# Altium PCB Main.PcbDoc (part 3 of 4)
Units mil, origin at the board's own origin, x right, y up, seen from the top; angles counter-clockwise.
Board outline 4000 x 4000 mil, 4 copper layers (L1-Top, L2-Ground, L3-Power, L4-Bottom), stack 63.556 mil thick; 424 components, 250 nets, 1628 pads, 3310 vias.
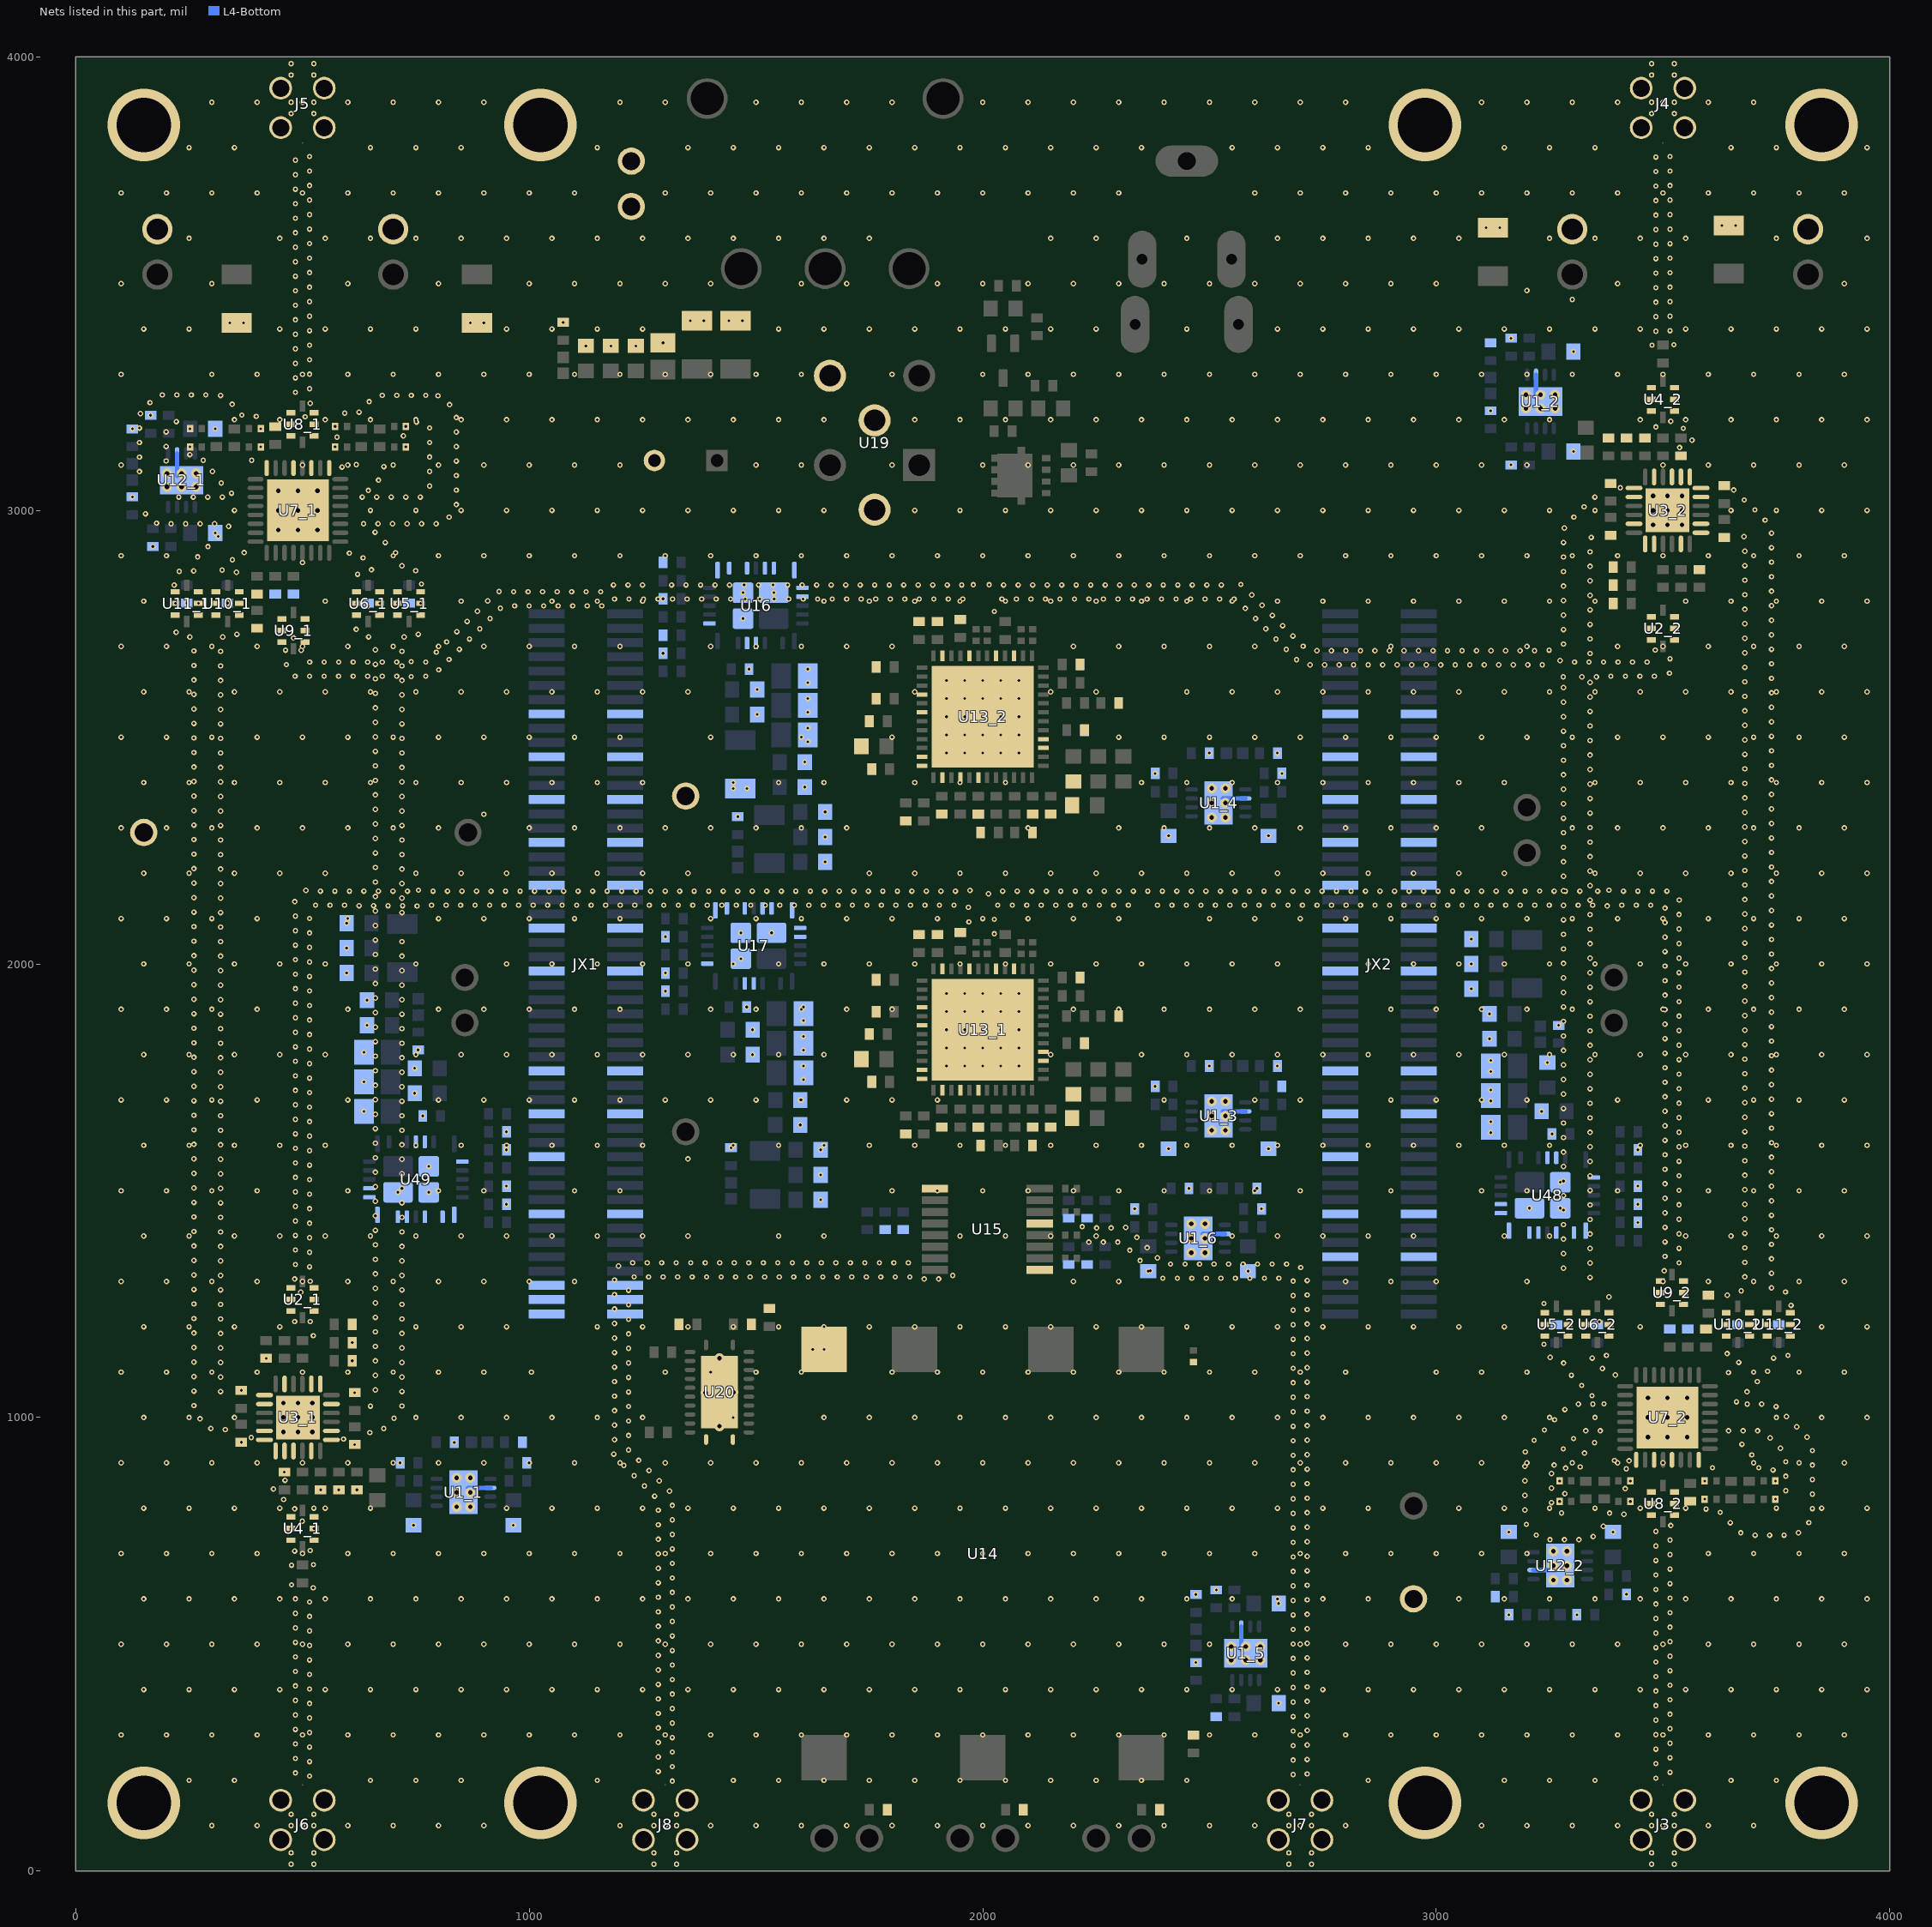
[diagram p5: the nets of this part, all layers, seen from the top]

## Via types
v1: diameter 12, hole 6, L1-Top to L2-Ground, tented top, 1761 vias
v2: diameter 12, hole 6, L1-Top to L4-Bottom, tented both sides, 971 vias
v3: diameter 12, hole 6, L3-Power to L4-Bottom, tented bottom, 308 vias
v4: diameter 12, hole 6, L3-Power to L4-Bottom, tented both sides, 148 vias
v5: diameter 22, hole 10, L1-Top to L4-Bottom, tented top, 48 vias
v6: diameter 22, hole 10, L1-Top to L4-Bottom, 36 vias
v7: diameter 12, hole 6, L1-Top to L2-Ground, tented both sides, 20 vias
v8: diameter 160, hole 120, L1-Top to L4-Bottom, 8 vias
v9: diameter 22, hole 10, L1-Top to L4-Bottom, tented both sides, 4 vias
v10: diameter 80, hole 66.93, L1-Top to L4-Bottom, tented both sides, 2 vias
v11: diameter 40, hole 31.5, L1-Top to L4-Bottom, 2 vias
v12: diameter 60, hole 47.24, L1-Top to L4-Bottom, 2 vias

## Nets (pads, with @x,y where several pads share a name; then routed paths per layer and width w, separated by ;. In a path a pad name is that pad's centre, name@x,y a point inside that pad or via, vN(x,y) a via of type N, cw(c..) or ccw(c..) an arc to the next point about the centre after c; other vN are vias at no path point) (continued)
GND: C1_1.1 C1_2.1 C1_3.1 C1_4.1 C1_5.1 C1_6.1 C2_1.1 C2_2.1 C2_3.1 C2_4.1 C2_5.1 C2_6.1 C3_1.1 C3_2.1 C3_3.1 C3_4.1 C3_5.1 C3_6.1 C4_1.2 C4_2.2 C5_1.2 C5_2.2 C6.2 C6_1.2 C6_2.2 C11_1.2 C11_2.2 C12_1.2 C12_2.2 C13_1.2 C13_2.2 C14_1.2 C14_2.2 C15_1.1 C15_2.1 C16.2 C16_1.1 C16_2.1 C17_1.1 C17_2.1 C18_1.2 C18_2.2 C19_1.2 C19_2.2 C21_1.2 C21_2.2 C22_1.1 C22_2.1 C23_1.2 C23_2.2 C24_1.1 C24_2.1 C25_1.2 C25_2.2 C26_1.1 C26_2.1 C27_1.1 C27_2.1 C28_1.2 C28_2.2 C29_1.1 C29_2.1 C30.1 C30_1.1 C30_2.1 C31_1.1 C31_2.1 C32_1.1 C32_2.1 C33_1.1 C33_2.1 C34_1.1 C34_2.1 C35_1.1 C35_2.1 C36_1.1 C36_2.1 C37_1.1 C37_2.1 C38_1.1 C38_2.1 C41_1.1 C41_2.1 C42_1.1 C42_2.1 C45.1 C45_1.1 C45_2.1 C46.1 C46_1.1 C46_2.1 C47.1 C47_1.1 C47_2.1 C48_1.1 C48_2.1 C49_1.1 C49_2.1 C50_1.1 C50_2.1 C51_1.1 C51_2.1 C52_1.1 C52_2.1 C53_1.1 C53_2.1 C54_1.1 C54_2.1 C56_1.1 C56_2.1 C61.2 C62.2 C63.2 C64.2 C65.1 C66.1 C67.2 C68.2 C69.2 C70.1 C71.1 C72.1 C73.1 C74.1 C75.1 C76.1 C77.1 C78.1 C79.1 C80.1 C81.1 C82.2 C83.1 C84.1 C85.1 C86.1 C87.1 C88.1 C89.1 C90.1 C91.1 C92.1 C93.1 C97.2 C98.1 C99.1 C100.1 C101.1 C102.1 C103.1 C105.1 C106.1 C107.1 C108.1 C110.1 C111.1 C194.1 C203.1 C227.1 C228.1 C229.1 C231.1 C232.1 C233.1 C234.1 C235.1 C236.1 C237.1 C238.1 C239.1 C241.1 C242.1 C243.1 C244.1 J2.1 J2.2 J3.G J4.G J5.G J6.G J7.G J8.G J9.2 J10.2 J11.2 J12.2 JX1.15 JX1.16 JX1.21 JX1.22 JX1.27 JX1.28 JX1.33 JX1.34 JX1.39 JX1.40 JX1.45 JX1.46 JX1.51 JX1.52 JX1.65 JX1.66 JX1.71 JX1.72 JX1.77 JX1.85 JX1.86 JX1.95 JX1.96 JX1.97 JX1.98 JX1.99 JX1.100 JX2.15 JX2.16 JX2.21 JX2.22 JX2.27 JX2.28 JX2.33 JX2.34 JX2.39 JX2.40 JX2.45 JX2.46 JX2.51 JX2.52 JX2.65 JX2.66 JX2.71 JX2.72 JX2.77 JX2.85 JX2.86 JX2.91 JX2.92 R3_1.1 R3_2.1 R3_3.1 R3_4.1 R3_5.1 R3_6.1 R4_1.1 R4_2.1 R4_3.1 R4_4.1 R4_5.1 R4_6.1 R5_1.1 R5_2.1 R5_3.1 R5_4.1 R5_5.1 R5_6.1 R6_1.1 R6_2.1 R7_1.1 R7_2.1 R8_1.1 R8_2.1 R9_1.1 R9_2.1 R10_1.1 R10_2.1 R11_1.1 R11_2.1 R12_1.2 R12_2.2 R14_1.1 R14_2.1 R15_1.2 R15_2.2 R18_1.1 R18_2.1 R19_1.1 R19_2.1 R20_1.1 R20_2.1 R22_1.2 R22_2.2 R26_1.2 R26_2.2 R27_1.1 R27_2.1 R28_1.1 R28_2.1 R29_1.2 R29_2.2 R35.1 R37.1 R38.1 R39.1 R43.1 R44.1 R45.1 R50.1 R54.1 R55.1 R59.2 R60.1 R61.1 R62.1 R66.1 R90.1 R93.1 R95.1 R96.1 R97.1 TP4.1 TP5.1 TP6.1 U1_1.6 U1_1.9 U1_2.6 U1_2.9 U1_3.6 U1_3.9 U1_4.6 U1_4.9 U1_5.6 U1_5.9 U1_6.6 U1_6.9 U2_1.1 U2_1.2 U2_1.3 U2_1.5 U2_1.6 U2_1.7 U2_2.1 U2_2.2 U2_2.3 U2_2.5 U2_2.6 U2_2.7 U3_1.1 U3_1.2 U3_1.5 U3_1.7 U3_1.8 U3_1.11 U3_1.12 U3_1.13 U3_1.14 U3_1.15 U3_1.17 U3_1.19 U3_1.20 U3_1.23 U3_1.25 U3_2.1 U3_2.2 U3_2.5 U3_2.7 U3_2.8 U3_2.11 U3_2.12 U3_2.13 U3_2.14 U3_2.15 U3_2.17 U3_2.19 U3_2.20 U3_2.23 U3_2.25 U4_1.1 U4_1.2 U4_1.3 U4_1.5 U4_1.6 U4_1.7 U4_2.1 U4_2.2 U4_2.3 U4_2.5 U4_2.6 U4_2.7 U5_1.1 U5_1.2 U5_1.3 U5_1.5 U5_1.6 U5_1.7 U5_2.1 U5_2.2 U5_2.3 U5_2.5 U5_2.6 U5_2.7 U6_1.1 U6_1.2 U6_1.3 U6_1.5 U6_1.6 U6_1.7 U6_2.1 U6_2.2 U6_2.3 U6_2.5 U6_2.6 U6_2.7 U7_1.1 U7_1.3 U7_1.5 U7_1.8 U7_1.33 U7_2.1 U7_2.3 U7_2.5 U7_2.8 U7_2.33 U8_1.1 U8_1.2 U8_1.3 U8_1.5 U8_1.6 U8_1.7 U8_2.1 U8_2.2 U8_2.3 U8_2.5 U8_2.6 U8_2.7 U9_1.1 U9_1.2 U9_1.3 U9_1.5 U9_1.6 U9_1.7 U9_2.1 U9_2.2 U9_2.3 U9_2.5 U9_2.6 U9_2.7 U10_1.1 U10_1.2 U10_1.3 U10_1.5 U10_1.6 U10_1.7 U10_2.1 U10_2.2 U10_2.3 U10_2.5 U10_2.6 U10_2.7 U11_1.1 U11_1.2 U11_1.3 U11_1.5 U11_1.6 U11_1.7 U11_2.1 U11_2.2 U11_2.3 U11_2.5 U11_2.6 U11_2.7 U12_1.6 U12_1.9 U12_2.6 U12_2.9 U13_1.2 U13_1.4 U13_1.6 U13_1.15 U13_1.16 U13_1.27 U13_1.29 U13_1.32 U13_1.35 U13_1.40 U13_1.42 U13_1.47 U13_1.48 U13_1.49 U13_2.2 U13_2.4 U13_2.6 U13_2.15 U13_2.16 U13_2.27 U13_2.29 U13_2.32 U13_2.35 U13_2.40 U13_2.42 U13_2.47 U13_2.48 U13_2.49 U14.7 U15.1 U15.9 U15.13 U16.1 U16.2 U16.3 U16.5 U16.6 U16.7 U16.8 U16.9 U16.16 U16.17 U16.20 U16.25 U16.26 U16.28 U17.1 U17.2 U17.3 U17.5 U17.6 U17.7 U17.8 U17.9 U17.16 U17.17 U17.20 U17.25 U17.26 U17.28 U19.3 U19.4 U19.6 U20.12 U20.13 U20.25 U48.1 U48.2 U48.3 U48.5 U48.6 U48.7 U48.8 U48.9 U48.16 U48.17 U48.20 U48.25 U48.26 U48.28 U49.1 U49.2 U49.3 U49.5 U49.6 U49.7 U49.8 U49.9 U49.16 U49.17 U49.20 U49.25 U49.26 U49.28
  other v1: 1315.55,198.17 3484.45,204.66 515.55,209.3 2684.45,212.54 2715.55,214.01 484.45,216.09 3515.55,217.66 1284.45,219.43 1315.55,230.17 3484.45,236.66 515.55,241.3 2684.45,244.54 2715.55,246.01 484.45,248.09 3515.55,249.66 1284.45,251.43 1315.55,262.17 3484.45,268.66 515.55,273.3 2684.45,276.54 2715.55,278.01 484.45,280.09 3515.55,281.66 1284.45,283.43 1315.55,294.17 3484.45,300.66 515.55,305.3 2684.45,308.54 2715.55,310.01 484.45,312.09 3515.55,313.66 1284.45,315.43 1315.55,326.17 3484.45,332.66 515.55,337.3 2684.45,340.54 2715.55,342.01 484.45,344.09 3515.55,345.66 1284.45,347.43 1315.55,358.17 3484.45,364.66 515.55,369.3 2684.45,372.54 2715.55,374.01 484.45,376.09 3515.55,377.66 1284.45,379.43 1315.55,390.17 3484.45,396.66 2450,400 2550,400 2650,400 515.55,401.3 2684.45,404.54 2715.55,406.01 484.45,408.09 3515.55,409.66 1284.45,411.43 1315.55,422.17 3484.45,428.66 515.55,433.3 2684.45,436.54 2715.55,438.01 484.45,440.09 3515.55,441.66 1284.45,443.43 1315.55,454.17 3484.45,460.66 515.55,465.3 2684.45,468.54 2715.55,470.01 484.45,472.09 3515.55,473.66 1284.45,475.43 1315.55,486.17 3484.45,492.66 515.55,497.3 3100,500 2684.45,500.54 2715.55,502.01 484.45,504.09 3515.55,505.66 1284.45,507.43 1315.55,518.17 3484.45,524.66 515.55,529.3 2684.45,532.54 2715.55,534.01 484.45,536.09 3515.55,537.66 1284.45,539.43 1315.55,550.17 3484.45,556.66 515.55,561.3 2684.45,564.54 2715.55,566.01 484.45,568.09 3515.55,569.66 1284.45,571.43 1315.55,582.17 3484.45,588.66 515.55,593.3 2684.45,596.54 2715.55,598.01 484.45,600.09 2450,600 2550,600 2650,600 3150,600 3350,600 3450,600 3515.55,601.66 1284.45,603.43 1315.55,614.17 3484.45,620.66 523.76,624.22 2684.45,628.54 2715.55,630.01 475.99,630.95 3515.55,633.66 1284.45,635.43 1315.55,646.17 3484.45,652.66 2684.45,660.54 2715.55,662.01 3515.55,665.66 1284.45,667.43 475.99,674.18 524.01,675.35 1315.55,678.17 3484.45,684.66 2684.45,692.54 2715.55,694.01 3515.55,697.66 1284.45,699.43 2600,700 3100,700 3200,700 3600,700 482.78,705.45 517.22,706.62 1315.55,710.17 3484.45,716.66 2684.45,724.54 2715.55,726.01 3515.55,729.66 1284.45,731.43 3250.8,730.51 3282.8,730.51 3314.8,730.51 3346.04,737.45 3220.48,740.74 3703.11,740.51 3735.11,740.51 3767.11,740.51 1315.55,742.17 3671.53,745.66 3798.67,745.79 3484.45,748.66 2684.45,756.54 2715.55,758.01 3368.7,760.04 3517.22,761.62 1284.45,763.43 3198.81,764.29 3648.42,767.8 3821.74,767.96 499.45,771.28 1315.55,774.17 3414.09,786.51 2684.45,788.54 3276.44,789.25 3382.19,789.06 2715.55,790.01 3626.09,790.72 1284.45,795.43 3195.51,796.12 3594.94,798.03 482.78,798.6 3829.49,799.01 525,800 950,800 1050,800 1150,800 1250,800 1350,800 1450,800 1550,800 1650,800 1750,800 1850,800 1950,800 2050,800 2150,800 2250,800 2350,800 2450,800 2550,800 2650,800 1315.55,806.17 3254.25,812.31 458.34,819.26 2684.45,820.54 2715.55,822.01 1276.57,826.44 3195.51,828.12 3829.49,831.01 3283.66,831.96 1309.41,837.58 3770.75,838.35 435.99,842.15 3416.88,842.93 3254.25,844.31 1253.95,849.07 2684.45,852.54 2715.55,854.01 1286.78,860.2 3195.51,860.12 461.58,861.37 3829.49,863.01 3770.75,870.35 1231.32,871.7 3254.25,876.31 1264.15,882.83 3742.75,884.21 2684.45,884.54 2715.55,886.01 3419.21,886.57 3285.44,888.4 3609.19,889.14 3711.14,889.21 3317.34,890.94 3195.51,892.12 1208.69,894.32 3260,895 3829.49,895.01 700,900 800,900 1000,900 3100,900 3770.75,902.35 3425.22,904.36 1241.53,905.46 3393.24,905.25 2684.45,916.54 3695.92,917.36 2715.55,918.01 1186.47,919.13 3326.84,921.5 3196.47,924.1 3829.49,927.01 1219.1,928.28 3280.07,930.78 3759.07,932.14 3674.22,940.87 3349.25,944.34 2684.45,948.54 2715.55,950.01 3215.81,949.6 1188.01,951.12 590.6,952.34 3302.7,953.4 3736.45,954.77 386.93,955.69 3817.58,956.71 1219.1,960.28 648.59,966.76 3329.67,970.63 3361.67,970.63 3644.65,970.63 3676.65,970.63 3708.65,970.63 3238.44,972.22 329.79,973.13 297.9,975.7 679.33,975.67 3794.96,979.34 2684.45,980.54 2715.55,982.01 1188.01,983.12 1219.1,992.28 3261.07,994.85 274.17,997.17 701.96,998.3 950,1000 1150,1000 1650,1000 1750,1000 1850,1000 1950,1000 2050,1000 2150,1000 2650,1000 3772.33,1001.97 2684.45,1012.54 2715.55,1014.01 1188.01,1015.12 3283.7,1017.48 1219.1,1024.28 3749.24,1024.13 650,1025 719.26,1025.21 260.63,1026.16 3313.4,1029.37 3345.4,1029.37 3685.68,1029.37 3717.68,1029.37 3370.01,1030.02 3662.09,1034.54 2684.45,1044.54 2715.55,1046.01 1188.01,1047.12 3343.46,1047.88 1219.1,1056.28 319.37,1057.21 719.37,1057.21 3685.27,1056.61 260.63,1058.16 660.63,1060.68 3320.83,1070.51 2684.45,1076.54 2715.55,1078.01 1188.01,1079.12 3707.9,1079.24 1219.1,1088.28 319.37,1089.21 719.37,1089.21 260.63,1090.16 660.63,1092.68 3298.21,1093.13 3395.11,1093.84 3644.43,1098.84 1005,1100 3100,1100 3200,1100 3730.52,1101.86 3366.41,1108 2684.45,1108.54 2715.55,1110.01 1188.01,1111.12 1219.1,1120.28 3280.78,1119.98 319.37,1121.21 719.37,1121.21 3667.05,1121.47 260.63,1122.16 660.63,1124.68 3344.03,1130.87 3744.03,1130.87 3251.38,1132.6 3375.46,1136.9 3775.46,1136.9 2684.45,1140.54 3641.56,1140.81 2715.55,1142.01 1188.01,1143.12 1219.1,1152.28 319.37,1153.21 719.37,1153.21 260.63,1154.16 660.63,1156.68 3237.59,1161.48 2684.45,1172.54 2715.55,1174.01 1188.01,1175.12 523.85,1180.32 1219.1,1184.28 319.37,1185.21 719.37,1185.21 260.63,1186.16 660.63,1188.68 450,1200 850,1200 950,1200 1250,1200 2650,1200 3050,1200 2684.45,1204.54 2715.55,1206.01 1188.01,1207.12 3359.83,1211.09 482.78,1211.55 517.22,1211.62 1219.1,1216.28 319.37,1217.21 719.37,1217.21 260.63,1218.16 660.63,1220.68 2684.45,1236.54 2715.55,1238.01 1188.01,1239.12 3782.41,1247.18 1219.1,1248.28 319.37,1249.21 719.37,1249.21 260.63,1250.16 3237.59,1251.22 660.63,1252.68 3380.76,1265.72 2684.45,1268.54 2715.55,1270.01 3641.92,1269.74 1188.01,1271.12 496.12,1276.28 3770.06,1276.7 3672.52,1279.13 1219.1,1280.28 319.37,1281.21 719.37,1281.21 260.63,1282.16 660.63,1284.68 3739.37,1285.78 517.22,1300.34 800,1300 1000,1300 2200,1300 2300,1300 2800,1300 2900,1300 3000,1300 2684.45,1300.54 2715.55,1302.01 1188.01,1303.12 482.78,1305.37 1870.92,1305.36 1902.92,1305.36 2397.1,1306.95 2429.1,1306.95 2461.1,1306.95 2493.1,1306.95 2525.1,1306.95 2557.1,1306.95 2589.1,1306.95 2621.1,1306.95 2653.1,1306.95 3339.37,1308.64 1231.24,1309.89 1263.24,1309.89 1295.24,1309.89 1327.24,1309.89 1359.24,1309.89 1391.24,1309.89 1423.24,1309.89 1455.24,1309.89 1487.24,1309.89 1519.24,1309.89 1551.24,1309.89 1583.24,1309.89 1615.24,1309.89 1647.24,1309.89 1679.24,1309.89 1711.24,1309.89 1743.24,1309.89 1775.24,1309.89 1807.24,1309.89 1839.24,1309.89 3680.63,1310.08 319.37,1313.21 719.37,1313.21 1933.92,1313.27 260.63,1314.16 660.63,1316.68 3739.37,1317.78 2369.64,1323.38 3502.78,1323.24 3280.63,1329.19 2701.31,1330.67 515.55,1332.3 1196.88,1333.87 484.45,1337.33 2414.17,1338.05 2446.17,1338.05 2478.17,1338.05 2510.17,1338.05 2542.17,1338.05 2574.17,1338.05 2606.17,1338.05 2638.17,1338.05 2670.17,1338.05 1228.08,1340.98 1260.08,1340.98 1292.08,1340.98 1324.08,1340.98 1356.08,1340.98 1388.08,1340.98 1420.08,1340.98 1452.08,1340.98 1484.08,1340.98 1516.08,1340.98 1548.08,1340.98 1580.08,1340.98 1612.08,1340.98 1644.08,1340.98 1676.08,1340.98 1708.08,1340.98 1740.08,1340.98 1772.08,1340.98 1804.08,1340.98 1836.08,1340.98 3339.37,1340.64 3535.54,1340.91 3680.63,1342.08 319.37,1345.21 719.37,1345.21 260.63,1346.16 2347.01,1346 660.63,1348.68 3739.37,1349.78 2385.25,1351.74 3504.45,1355.2 3280.63,1361.19 515.55,1364.3 484.45,1369.33 2324.38,1368.63 3339.37,1372.64 3535.54,1372.91 2362.62,1374.36 3680.63,1374.08 319.37,1377.21 719.37,1377.21 260.63,1378.16 660.63,1380.68 3739.37,1381.78 2233.95,1386.66 2265.95,1386.66 2297.95,1386.66 3504.45,1387.2 3280.63,1393.19 515.55,1396.3 2339.99,1396.99 950,1400 1050,1400 1250,1400 1350,1400 2550,1400 2650,1400 2750,1400 2950,1400 3150,1400 3250,1400 484.45,1401.33 3339.37,1404.64 3535.54,1404.91 3680.63,1406.08 319.37,1409.21 719.37,1409.21 260.63,1410.16 660.63,1412.68 3739.37,1413.78 2251.24,1417.75 2283.24,1417.75 2315.24,1419 3504.45,1419.2 2219.37,1420.64 3280.63,1425.19 515.55,1428.3 484.45,1433.33 3339.37,1436.64 3535.54,1436.91 3680.63,1438.08 319.37,1441.21 719.37,1441.21 260.63,1442.16 660.63,1444.68 3739.37,1445.78 3504.45,1451.2 3280.63,1457.19 515.55,1460.3 484.45,1465.33 3339.37,1468.64 3535.54,1468.91 3680.63,1470.08 319.37,1473.21 719.37,1473.21 260.63,1474.16 660.63,1476.68 3739.37,1477.78 3504.45,1483.2 3280.63,1489.19 515.55,1492.3 484.45,1497.33 800,1500 900,1500 1200,1500 2300,1500 2400,1500 2500,1500 2600,1500 2700,1500 3200,1500 3400,1500 3339.37,1500.64 3535.54,1500.91 3680.63,1502.08 319.37,1505.21 719.37,1505.21 260.63,1506.16 660.63,1508.68 3739.37,1509.78 3504.45,1515.2 3280.63,1521.19 515.55,1524.3 484.45,1529.33 3339.37,1532.64 3535.54,1532.91 3680.63,1534.08 319.37,1537.21 719.37,1537.21 260.63,1538.16 660.63,1540.68 3739.37,1541.78 3504.45,1547.2 3280.63,1553.19 515.55,1556.3 484.45,1561.33 3339.37,1564.64 3535.54,1564.91 3680.63,1566.08 319.37,1569.21 719.37,1569.21 260.63,1570.16 660.63,1572.68 3739.37,1573.78 3504.45,1579.2 3280.63,1585.19 515.55,1588.3 484.45,1593.33 3339.37,1596.64 3535.54,1596.91 3680.63,1598.08 550,1600 750,1600 850,1600 950,1600 1050,1600 1250,1600 1450,1600 1550,1600 1650,1600 2550,1600 2650,1600 2750,1600 2950,1600 3150,1600 3250,1600 3450,1600 319.37,1601.21 719.37,1601.21 260.63,1602.16 660.63,1604.68 3739.37,1605.78 3504.45,1611.2 3280.63,1617.19 515.55,1620.3 484.45,1625.33 3339.37,1628.64 3535.54,1628.91 3680.63,1630.08 319.37,1633.21 719.37,1633.21 260.63,1634.16 660.63,1636.68 3739.37,1637.78 3504.45,1643.2 3280.63,1649.19 515.55,1652.3 484.45,1657.33 3339.37,1660.64 3535.54,1660.91 3680.63,1662.08 319.37,1665.21 719.37,1665.21 260.63,1666.16 660.63,1668.68 3739.37,1669.78 3504.45,1675.2 3280.63,1681.19 515.55,1684.3 484.45,1689.33 3339.37,1692.64 3535.54,1692.91 3680.63,1694.08 319.37,1697.21 719.37,1697.21 260.63,1698.16 600,1700 800,1700 900,1700 1000,1700 1200,1700 1400,1700 1600,1700 1700,1700 1800,1700 2400,1700 2600,1700 2700,1700 3000,1700 3100,1700 3200,1700 3400,1700 660.63,1700.68 3739.37,1701.78 3504.45,1707.2 3280.63,1713.19 515.55,1716.3 484.45,1721.33 3339.37,1724.64 3535.54,1724.91 3680.63,1726.08 319.37,1729.21 719.37,1729.21 260.63,1730.16 660.63,1732.68 3739.37,1733.78 3504.45,1739.2 3280.63,1745.19 515.55,1748.3 484.45,1753.33 3339.37,1756.64 3535.54,1756.91 3680.63,1758.08 319.37,1761.21 719.37,1761.21 260.63,1762.16 660.63,1764.68 3739.37,1765.78 3504.45,1771.2 3280.63,1777.19 515.55,1780.3 484.45,1785.33 3339.37,1788.64 3535.54,1788.91 3680.63,1790.08 319.37,1793.21 719.37,1793.21 260.63,1794.16 660.63,1796.68 3739.37,1797.78 750,1800 850,1800 950,1800 1050,1800 1250,1800 1450,1800 1550,1800 2450,1800 2550,1800 2650,1800 2750,1800 2950,1800 3150,1800 3250,1800 3504.45,1803.2 3280.63,1809.19 515.55,1812.3 484.45,1817.33 3339.37,1820.64 3535.54,1820.91 3680.63,1822.08 319.37,1825.21 719.37,1825.21 260.63,1826.16 660.63,1828.68 3739.37,1829.78 3504.45,1835.2 3280.63,1841.19 515.55,1844.3 484.45,1849.33 3339.37,1852.64 3535.54,1852.91 3680.63,1854.08 319.37,1857.21 719.37,1857.21 260.63,1858.16 660.63,1860.68 3739.37,1861.78 3504.45,1867.2 3280.63,1873.19 515.55,1876.3 484.45,1881.33 3339.37,1884.64 3535.54,1884.91 3680.63,1886.08 319.37,1889.21 719.37,1889.21 260.63,1890.16 660.63,1892.68 3739.37,1893.78 3504.45,1899.2 1000,1900 1100,1900 1200,1900 1400,1900 1500,1900 1600,1900 1700,1900 2400,1900 2700,1900 2900,1900 3000,1900 3100,1900 3200,1900 3280.63,1905.19 515.55,1908.3 484.45,1913.33 3339.37,1916.64 3535.54,1916.91 3680.63,1918.08 319.37,1921.21 719.37,1921.21 260.63,1922.16 660.63,1924.68 3739.37,1925.78 3504.45,1931.2 3280.63,1937.19 515.55,1940.3 484.45,1945.33 3339.37,1948.64 3535.54,1948.91 3680.63,1950.08 319.37,1953.21 719.37,1953.21 260.63,1954.16 660.63,1956.68 3739.37,1957.78 3504.45,1963.2 3280.63,1969.19 515.55,1972.3 484.45,1977.33 3339.37,1980.64 3535.54,1980.91 3680.63,1982.08 319.37,1985.21 719.37,1985.21 260.63,1986.16 660.63,1988.68 3739.37,1989.78 3504.45,1995.2 750,2000 950,2000 1050,2000 1250,2000 1350,2000 1450,2000 1550,2000 1750,2000 2150,2000 2850,2000 2950,2000 3050,2000 3150,2000 3250,2000 3280.63,2001.19 515.55,2004.3 484.45,2009.33 3339.37,2012.64 3535.54,2012.91 3680.63,2014.08 319.37,2017.21 719.37,2017.21 260.63,2018.16 660.63,2020.68 3739.37,2021.78 3504.45,2027.2 3280.63,2033.19 515.55,2036.3 484.45,2041.33 3339.37,2044.64 3535.54,2044.91 3680.63,2046.08 319.37,2049.21 719.37,2049.21 260.63,2050.16 660.63,2052.68 3739.37,2053.78 3504.45,2059.2 3280.63,2065.19 2025.55,2066.37 515.55,2068.3 484.45,2073.33 3339.37,2076.64 3535.54,2076.91 3680.63,2078.08 319.37,2081.21 260.63,2082.16 660.63,2084.68 3739.37,2085.78 3504.45,2091.2 1969.45,2092.78 3280.63,2097.19 2025.55,2098.37 515.55,2100.3 600,2100 800,2100 900,2100 1000,2100 1200,2100 1400,2100 1500,2100 1600,2100 1700,2100 1800,2100 2300,2100 2700,2100 2800,2100 3000,2100 3100,2100 484.45,2105.33 3339.37,2108.64 3535.54,2108.91 3680.63,2110.08 319.37,2113.21 719.37,2113.21 260.63,2114.16 660.63,2116.68 3739.37,2117.78 3504.45,2123.2 1968.26,2124.75 528.74,2129.45 560.74,2129.45 592.74,2129.45 784.61,2129.45 816.61,2129.45 848.61,2129.45 880.61,2129.45 912.61,2129.45 944.61,2129.45 976.61,2129.45 1008.61,2129.45 1040.61,2129.45 1072.61,2129.45 1104.61,2129.45 1136.61,2129.45 1168.61,2129.45 1200.61,2129.45 1232.61,2129.45 1264.61,2129.45 1296.61,2129.45 1328.61,2129.45 1360.61,2129.45 1392.61,2129.45 1424.61,2129.45 1456.61,2129.45 1488.61,2129.45 1520.61,2129.45 1552.61,2129.45 1584.61,2129.45 1616.61,2129.45 1648.61,2129.45 1680.61,2129.45 1712.61,2129.45 1744.61,2129.45 1776.61,2129.45 1808.61,2129.45 1840.61,2129.45 1872.61,2129.45 1904.61,2129.45 1936.61,2129.45 2033.15,2129.45 2065.15,2129.45 2097.15,2129.45 2129.15,2129.45 2161.15,2129.45 2193.15,2129.45 2225.15,2129.45 2257.15,2129.45 2289.15,2129.45 2321.15,2129.45 2385.15,2129.45 2417.15,2129.45 2449.15,2129.45 2481.15,2129.45 2513.15,2129.45 2545.15,2129.45 2577.15,2129.45 2609.15,2129.45 2641.15,2129.45 2673.15,2129.45 2705.15,2129.45 2737.15,2129.45 2769.15,2129.45 2801.15,2129.45 2833.15,2129.45 2865.15,2129.45 2897.15,2129.45 2929.15,2129.45 2961.15,2129.45 2993.15,2129.45 3025.15,2129.45 3057.15,2129.45 3089.15,2129.45 3121.15,2129.45 3153.15,2129.45 3185.15,2129.45 3217.15,2129.45 3280.63,2129.19 3409.07,2129.45 3441.07,2129.45 3473.07,2129.45 482.92,2137.33 3339.37,2140.64 3536.03,2140.88 3680.63,2142.08 319.37,2145.21 719.37,2145.21 260.63,2146.16 660.63,2148.68 3739.37,2149.78 2012.63,2154.62 539.46,2160.55 571.46,2160.55 603.46,2160.55 787.79,2160.55 819.79,2160.55 851.79,2160.55 883.79,2160.55 915.79,2160.55 947.79,2160.55 979.79,2160.55 1011.79,2160.55 1043.79,2160.55 1075.79,2160.55 1107.79,2160.55 1139.79,2160.55 1171.79,2160.55 1203.79,2160.55 1235.79,2160.55 1267.79,2160.55 1299.79,2160.55 1331.79,2160.55 1363.79,2160.55 1395.79,2160.55 1427.79,2160.55 1459.79,2160.55 1491.79,2160.55 1523.79,2160.55 1555.79,2160.55 1587.79,2160.55 1619.79,2160.55 1651.79,2160.55 1683.79,2160.55 1715.79,2160.55 1747.79,2160.55 1779.79,2160.55 1811.79,2160.55 1843.79,2160.55 1875.79,2160.55 1907.79,2160.55 1939.79,2160.55 2044.08,2160.55 2076.08,2160.55 2108.08,2160.55 2140.08,2160.55 2172.08,2160.55 2204.08,2160.55 2236.08,2160.55 2268.08,2160.55 2300.08,2160.55 2332.08,2160.55 2364.08,2160.55 2396.08,2160.55 2428.08,2160.55 2460.08,2160.55 2492.08,2160.55 2524.08,2160.55 2556.08,2160.55 2588.08,2160.55 2620.08,2160.55 2652.08,2160.55 2684.08,2160.55 2716.08,2160.55 2748.08,2160.55 2780.08,2160.55 2812.08,2160.55 2844.08,2160.55 2876.08,2160.55 2908.08,2160.55 2940.08,2160.55 2972.08,2160.55 3004.08,2160.55 3036.08,2160.55 3068.08,2160.55 3100.08,2160.55 3132.08,2160.55 3164.08,2160.55 3196.08,2160.55 3280.63,2161.19 3412.79,2160.55 3444.79,2160.55 3476.79,2160.55 3508.79,2160.55 507.46,2162.04 1971.79,2162.19 3339.37,2172.64 3680.63,2174.08 319.37,2177.21 719.37,2177.21 260.63,2178.16 660.63,2180.68 3739.37,2181.78 3280.63,2193.19 550,2200 750,2200 850,2200 950,2200 1050,2200 1250,2200 1750,2200 1950,2200 2750,2200 2850,2200 2950,2200 3150,2200 3339.37,2204.64 3680.63,2206.08 319.37,2209.21 719.37,2209.21 260.63,2210.16 660.63,2212.68 3739.37,2213.78 3280.63,2225.19 3339.37,2236.64 3680.63,2238.08 319.37,2241.21 719.37,2241.21 260.63,2242.16 660.63,2244.68 3739.37,2245.78 3280.63,2257.19 3339.37,2268.64 3680.63,2270.08 319.37,2273.21 719.37,2273.21 260.63,2274.16 660.63,2276.68 3739.37,2277.78 3280.63,2289.19 500,2300 1000,2300 1200,2300 1500,2300 1600,2300 1700,2300 2400,2300 2500,2300 2600,2300 2700,2300 2800,2300 3000,2300 3100,2300 3339.37,2300.64 3680.63,2302.08 319.37,2305.21 719.37,2305.21 260.63,2306.16 660.63,2308.68 3739.37,2309.78 3280.63,2321.19 3339.37,2332.64 3680.63,2334.08 319.37,2337.21 719.37,2337.21 260.63,2338.16 660.63,2340.68 3739.37,2341.78 3280.63,2353.19 3339.37,2364.64 3680.63,2366.08 319.37,2369.21 719.37,2369.21 260.63,2370.16 660.63,2372.68 3739.37,2373.78 3280.63,2385.19 3339.37,2396.64 3680.63,2398.08 950,2400 1050,2400 1250,2400 1450,2400 1550,2400 2350,2400 2450,2400 2550,2400 2650,2400 2750,2400 2850,2400 2950,2400 3150,2400 319.37,2401.21 719.37,2401.21 260.63,2402.16 660.63,2404.68 3739.37,2405.78 3280.63,2417.19 3339.37,2428.64 3680.63,2430.08 319.37,2433.21 719.37,2433.21 260.63,2434.16 660.63,2436.68 3739.37,2437.78 3280.63,2449.19 3339.37,2460.64 3680.63,2462.08 319.37,2465.21 719.37,2465.21 260.63,2466.16 660.63,2468.68 3739.37,2469.78 3280.63,2481.19 3339.37,2492.64 3680.63,2494.08 319.37,2497.21 719.37,2497.21 260.63,2498.16 500,2500 1000,2500 1100,2500 1200,2500 1400,2500 1600,2500 2700,2500 2800,2500 3000,2500 3100,2500 660.63,2500.68 3739.37,2501.78 3280.63,2513.19 3339.37,2524.64 3680.63,2526.08 319.37,2529.21 719.37,2529.21 260.63,2530.16 660.63,2532.68 3739.37,2533.78 3280.63,2545.19 3339.37,2556.64 3680.63,2558.08 319.37,2561.21 719.37,2561.21 260.63,2562.16 660.63,2564.68 3739.37,2565.78 3280.63,2577.19 3339.37,2588.64 3680.63,2590.08 319.37,2593.21 719.37,2593.21 260.63,2594.16 660.63,2596.68 3739.37,2597.78 550,2600 950,2600 1050,2600 1250,2600 2750,2600 2850,2600 2950,2600 3150,2600 3280.63,2609.19 3339.37,2620.64 3680.63,2622.08 319.37,2625.21 719.37,2625.21 260.63,2626.16 660.63,2628.68 3739.37,2629.78 483.77,2634.45 515.77,2634.45 547.77,2634.45 579.77,2634.45 611.77,2634.45 771.75,2634.45 3385.13,2634.45 3417.13,2634.45 3449.13,2634.45 3481.13,2634.45 3514.42,2641.15 800.5,2648.51 3680.63,2654.08 319.37,2657.21 719.37,2657.21 260.63,2658.16 2721.94,2659.45 2753.94,2659.45 2785.94,2659.45 2817.94,2659.45 2849.94,2659.45 2881.94,2659.45 2913.94,2659.45 2945.94,2659.45 2977.94,2659.45 3009.94,2659.45 3041.94,2659.45 3073.94,2659.45 3105.94,2659.45 3137.94,2659.45 3169.94,2659.45 3201.94,2659.45 3233.94,2659.45 464.46,2659.97 660.63,2660.68 3739.37,2661.78 515.85,2665.55 547.85,2665.55 579.85,2665.55 611.85,2665.55 771.82,2665.55 3400.96,2665.55 3432.96,2665.55 3464.96,2665.55 823.12,2671.14 2692.07,2670.94 3515.55,2672.99 3339.37,2684.64 3680.63,2686.08 795.3,2687.28 319.37,2689.21 719.37,2689.21 260.63,2690.16 2736.93,2690.55 2768.93,2690.55 2800.93,2690.55 2832.93,2690.55 2864.93,2690.55 2896.93,2690.55 2928.93,2690.55 2960.93,2690.55 2992.93,2690.55 3024.93,2690.55 3056.93,2690.55 3088.93,2690.55 3120.93,2690.55 3152.93,2690.55 3184.93,2690.55 3216.93,2690.55 462.79,2691.92 497.22,2691.56 3248.92,2691.77 3482.78,2692.12 660.63,2692.68 845.75,2693.77 2669.45,2693.57 3739.37,2693.78 900,2700 1000,2700 1200,2700 1400,2700 1500,2700 1600,2700 1800,2700 2200,2700 2706.51,2700.48 3280.63,2705.19 817.93,2709.91 868.38,2716.39 2646.82,2716.2 3339.37,2716.64 3680.63,2718.08 480.28,2718.72 251.63,2720.87 324.03,2720.87 645.89,2721.09 724.03,2720.87 2683.88,2723.1 3739.37,2725.78 355.46,2726.9 755.46,2726.9 221.33,2731.15 840.56,2732.54 3280.63,2737.19 618.54,2737.7 891,2739.02 2624.19,2738.82 2661.25,2745.73 3339.37,2748.64 3680.63,2750.08 863.18,2755.17 3739.37,2757.78 2601.56,2761.45 913.63,2761.65 2638.62,2768.36 3280.63,2769.19 2025.55,2777.17 885.81,2777.79 3339.37,2780.64 3680.63,2782.08 936.26,2784.28 2578.94,2784.08 643.61,2788.91 967.84,2789.45 999.84,2789.45 1031.84,2789.45 1063.84,2789.45 1095.84,2789.45 1127.84,2789.45 1159.84,2789.45 3739.37,2789.78 2616,2790.99 550,2800 908.44,2800.42 3150,2800 3550,2800 3280.63,2801.19 1188.1,2804.45 1220.1,2804.45 1252.1,2804.45 1284.1,2804.45 1316.1,2804.45 1348.1,2804.45 1380.1,2804.45 1412.1,2804.45 1444.1,2804.45 1476.1,2804.45 1508.1,2804.45 1540.1,2804.45 1572.1,2804.45 1604.1,2804.45 1636.1,2804.45 1668.1,2804.45 1700.1,2804.45 1732.1,2804.45 1764.1,2804.45 1796.1,2804.45 1828.1,2804.45 1860.1,2804.45 1892.1,2804.45 1924.1,2804.45 1956.1,2804.45 2042.26,2804.45 2074.26,2804.45 2106.26,2804.45 2138.26,2804.45 2170.26,2804.45 2202.26,2804.45 2234.26,2804.45 2266.26,2804.45 2298.26,2804.45 2330.26,2804.45 2362.26,2804.45 2394.26,2804.45 2426.26,2804.45 2458.26,2804.45 2490.26,2804.45 2522.26,2804.45 2554.26,2804.45 3339.37,2812.64 2593.37,2813.61 3680.63,2814.08 933.55,2821.26 965.55,2820.55 997.55,2820.55 1029.55,2820.55 1061.55,2820.55 1093.55,2820.55 1125.55,2820.55 1157.55,2820.55 3739.37,2821.78 3280.63,2833.19 217.18,2835.43 1185.81,2835.55 1217.81,2835.55 1249.81,2835.55 1313.81,2835.55 1345.81,2835.55 1377.81,2835.55 1409.81,2835.55 1441.81,2835.55 1473.81,2835.55 1505.81,2835.55 1537.81,2835.55 1569.81,2835.55 1601.81,2835.55 1633.81,2835.55 1665.81,2835.55 1697.81,2835.55 1729.81,2835.55 1761.81,2835.55 1793.81,2835.55 1825.81,2835.55 1857.81,2835.55 1889.81,2835.55 1921.81,2835.55 1953.81,2835.55 1979.29,2836 2014.21,2836 2046.18,2835.55 2078.18,2835.55 2110.18,2835.55 2142.18,2835.55 2174.18,2835.55 2206.18,2835.55 2238.18,2835.55 2270.18,2835.55 2302.18,2835.55 2334.18,2835.55 2366.18,2835.55 2398.18,2835.55 2430.18,2835.55 2462.18,2835.55 2494.18,2835.55 2526.18,2835.55 2569.29,2836.69 762.41,2837.8 3339.37,2844.64 3680.63,2846.08 3739.37,2853.78 621.58,2859.23 354.52,2863.72 228.13,2865.5 3280.63,2865.19 260.11,2866.67 749.5,2867.08 322.88,2868.46 652.01,2869.13 3339.37,2876.64 719.37,2877.88 3680.63,2878.08 3739.37,2885.78 345.5,2891.09 633.54,2895.26 268.81,2897.46 3280.63,2897.19 200,2900 800,2900 1000,2900 1100,2900 1200,2900 1300,2900 1400,2900 1500,2900 1600,2900 1700,2900 1800,2900 1900,2900 2000,2900 2100,2900 2200,2900 2300,2900 2400,2900 2500,2900 2600,2900 2700,2900 2800,2900 2900,2900 3000,2900 3100,2900 603.31,2905.76 371.32,2906.9 705.28,2906.6 3339.37,2908.64 3680.63,2910.08 3739.37,2917.78 291.43,2920.09 682.65,2929.23 3280.63,2929.19 3341.8,2940.55 3678.68,2942.02 314.06,2942.72 3739.37,2949.78 660.02,2951.86 3282.48,2961.14 337.11,2964.92 210.37,2970.63 242.37,2970.63 274.37,2970.63 306.37,2970.63 634.7,2970.63 666.7,2970.63 698.7,2970.63 730.7,2970.63 762.7,2970.63 794.7,2970.63 178.4,2972.07 3725.28,2978.51 823.28,2985.03 3303.47,2985.29 153.75,2992.47 950,3000 1050,3000 1150,3000 1250,3000 1350,3000 1450,3000 2950,3000 3702.65,3001.13 3326.1,3007.92 839.18,3012.8 3679.24,3022.96 227.16,3029.37 259.16,3029.37 291.16,3029.37 323.16,3029.37 631.74,3029.37 663.74,3029.37 695.74,3029.37 727.74,3029.37 759.74,3029.37 3349.84,3029.38 343.54,3037.8 645.05,3044.06 839.18,3044.8 3655.99,3044.94 3405.99,3049.94 780.43,3053.78 320.91,3060.43 667.68,3066.68 839.18,3076.8 140.51,3085.6 301.59,3085.94 780.43,3085.78 587.2,3095.64 679.37,3096.47 100,3100 700,3100 900,3100 2700,3100 3100,3100 3200,3100 618.77,3100.86 199.25,3109.02 839.18,3108.8 281.1,3110.52 388.12,3110.52 140.51,3117.6 780.43,3117.78 251.62,3122.99 3536.52,3138.63 199.25,3141.02 839.18,3140.8 140.51,3149.6 780.43,3149.78 3564.01,3155 576.18,3161.51 722.5,3164.37 199.25,3173.02 839.18,3172.8 3545,3180.74 140.51,3181.6 780.43,3181.78 3484.45,3183.98 751.23,3194.87 221.77,3195.75 3517.22,3196.62 950,3200 2950,3200 3150,3200 3250,3200 839.18,3204.8 506.02,3206.29 398.2,3207.25 366.34,3210.23 142.59,3213.54 593.03,3214.48 624.96,3216.64 824.32,3233.14 344.93,3234.02 517.22,3236.27 163.76,3237.54 647.11,3239.73 319.53,3253.48 798.91,3252.6 190.89,3254.49 222.89,3254.49 254.89,3254.49 286.89,3254.49 675.94,3253.61 707.94,3253.61 739.94,3253.61 771.94,3253.61 484.45,3260.25 515.55,3268.22 484.45,3292.25 100,3300 515.55,3300.22 2700,3300 3100,3300 3200,3300 484.45,3324.25 515.55,3332.22 484.45,3356.25 515.55,3364.22 3475.99,3364.21 3524.01,3365.33 484.45,3388.25 3484.45,3395.07 515.55,3396.22 3515.55,3396.19 950,3400 2750,3400 2850,3400 2950,3400 3050,3400 3150,3400 3250,3400 484.45,3420.25 3484.45,3427.07 515.55,3428.22 3515.55,3428.19 484.45,3452.25 3484.45,3459.07 515.55,3460.22 3515.55,3460.19 3300,3465 484.45,3484.25 3200,3485 3484.45,3491.07 515.55,3492.22 3515.55,3492.19 300,3500 600,3500 800,3500 3000,3500 3400,3500 484.45,3516.25 3484.45,3523.07 515.55,3524.22 3515.55,3524.19 484.45,3548.25 3484.45,3555.07 515.55,3556.22 3515.55,3556.19 484.45,3580.25 3484.45,3587.07 515.55,3588.22 3515.55,3588.19 1450,3600 1650,3600 1750,3600 3750,3600 484.45,3612.25 3484.45,3619.07 515.55,3620.22 3515.55,3620.19 484.45,3644.25 3484.45,3651.07 515.55,3652.22 3515.55,3652.19 484.45,3676.25 3484.45,3683.07 515.55,3684.22 3515.55,3684.19 484.45,3708.25 3484.45,3715.07 515.55,3716.22 3515.55,3716.19 484.45,3740.25 3484.45,3747.07 515.55,3748.22 3515.55,3748.19 484.45,3772.25 3484.45,3779.07 515.55,3780.22 3515.55,3780.19 250,3800 350,3800 3650,3800 3700,3900
  other v2: 300,100 400,100 600,100 700,100 800,100 900,100 1200,100 1400,100 1500,100 1600,100 1700,100 1800,100 1900,100 2000,100 2100,100 2200,100 2300,100 2400,100 2500,100 2600,100 2800,100 3100,100 3200,100 3300,100 3400,100 3600,100 3700,100 250,200 350,200 650,200 750,200 850,200 1150,200 1450,200 1550,200 1750,200 1850,200 2150,200 2250,200 2450,200 2850,200 3150,200 3250,200 3350,200 3650,200 3750,200 100,300 200,300 300,300 400,300 600,300 700,300 800,300 900,300 1000,300 1100,300 1200,300 1400,300 1500,300 1800,300 1900,300 2100,300 2200,300 2500,300 2800,300 2900,300 3000,300 3100,300 3200,300 3300,300 3400,300 3600,300 3700,300 3800,300 3900,300 150,400 250,400 350,400 450,400 550,400 650,400 750,400 850,400 950,400 1050,400 1150,400 1250,400 1350,400 1450,400 1550,400 1650,400 1750,400 1850,400 1950,400 2050,400 2150,400 2250,400 2350,400 2750,400 2850,400 2950,400 3050,400 3150,400 3250,400 3350,400 3450,400 3550,400 3650,400 3750,400 3850,400 3950,400 100,500 200,500 300,500 400,500 600,500 700,500 800,500 900,500 1000,500 1100,500 1200,500 1400,500 1500,500 1600,500 1700,500 1800,500 1900,500 2000,500 2100,500 2200,500 2300,500 2400,500 2500,500 2800,500 2900,500 3000,500 3200,500 3300,500 3400,500 3600,500 3700,500 3800,500 3900,500 150,600 250,600 350,600 450,600 550,600 650,600 750,600 850,600 950,600 1050,600 1150,600 1250,600 1350,600 1450,600 1550,600 1650,600 1750,600 1850,600 1950,600 2050,600 2150,600 2250,600 2350,600 2750,600 2850,600 3050,600 3250,600 3550,600 3650,600 3750,600 3850,600 3950,600 100,700 200,700 300,700 400,700 600,700 700,700 800,700 900,700 1000,700 1100,700 1200,700 1400,700 1500,700 1600,700 1700,700 1800,700 1900,700 2000,700 2100,700 2200,700 2300,700 2400,700 2500,700 2800,700 2900,700 3000,700 3700,700 3800,700 3900,700 474.41,755 525.59,755 150,800 250,800 350,800 2750,800 2850,800 3050,800 3150,800 3850,800 3950,800 540,840.32 580,840.32 620,840.32 460,879.68 100,900 200,900 300,900 400,900 900,900 1100,900 1300,900 1400,900 1500,900 1600,900 1700,900 1800,900 1900,900 2000,900 2100,900 2200,900 2300,900 2400,900 2500,900 2600,900 2800,900 2900,900 3000,900 3900,900 150,1000 250,1000 750,1000 850,1000 2250,1000 2350,1000 2450,1000 2550,1000 2750,1000 2850,1000 2950,1000 3050,1000 3150,1000 3850,1000 3950,1000 100,1100 200,1100 400,1100 800,1100 900,1100 1300,1100 2000,1100 2500,1100 2600,1100 2800,1100 3000,1100 3800,1100 3900,1100 609.68,1125 420,1130.32 1625,1150 1650,1150 609.68,1165 150,1200 350,1200 750,1200 1750,1200 1950,1200 2050,1200 2250,1200 2450,1200 2550,1200 2750,1200 2850,1200 2950,1200 3150,1200 3850,1200 3950,1200 100,1300 200,1300 400,1300 600,1300 900,1300 1100,1300 3800,1300 3900,1300 150,1400 350,1400 450,1400 550,1400 750,1400 850,1400 2050,1400 2850,1400 3650,1400 3850,1400 3950,1400 100,1500 200,1500 400,1500 600,1500 1800,1500 2000,1500 3100,1500 3600,1500 3800,1500 3900,1500 1350,1570 150,1600 350,1600 450,1600 1750,1600 2150,1600 2250,1600 2450,1600 2850,1600 3050,1600 3650,1600 3850,1600 3950,1600 100,1700 200,1700 400,1700 1100,1700 1300,1700 1500,1700 2900,1700 3600,1700 3800,1700 3900,1700 1920,1775 1960,1775 2000,1775 2040,1775 2080,1775 150,1800 350,1800 450,1800 550,1800 1150,1800 1350,1800 1650,1800 2850,1800 3050,1800 3450,1800 3650,1800 3850,1800 3950,1800 1920,1815 1960,1815 2000,1815 2040,1815 2080,1815 1920,1855 1960,1855 2000,1855 2040,1855 2080,1855 1920,1895 1960,1895 2000,1895 2040,1895 2080,1895 100,1900 200,1900 400,1900 600,1900 800,1900 900,1900 2500,1900 2600,1900 3600,1900 3800,1900 3900,1900 1920,1935 1960,1935 2000,1935 2040,1935 2080,1935 150,2000 350,2000 450,2000 550,2000 1150,2000 1650,2000 2250,2000 3450,2000 3650,2000 3850,2000 3950,2000 100,2100 200,2100 400,2100 1100,2100 1900,2100 2100,2100 2200,2100 2500,2100 2600,2100 2900,2100 3200,2100 3400,2100 3600,2100 3800,2100 3900,2100 624.72,2128.32 752.65,2127.76 3377.11,2127.86 3249.15,2129.45 635.46,2160.55 731.46,2160.55 3228.08,2160.77 3260.08,2160.55 3356.08,2160.55 755.85,2162.54 3380.85,2162.54 150,2200 350,2200 450,2200 1150,2200 2450,2200 2550,2200 2650,2200 3050,2200 3450,2200 3550,2200 3650,2200 3850,2200 3950,2200 100,2300 200,2300 400,2300 600,2300 800,2300 1100,2300 1400,2300 2900,2300 3400,2300 3500,2300 3600,2300 3800,2300 3900,2300 900,2330 150,2400 350,2400 450,2400 550,2400 750,2400 850,2400 1150,2400 1650,2400 3050,2400 3450,2400 3550,2400 3650,2400 3850,2400 3950,2400 1920,2465 1960,2465 2000,2465 2040,2465 2080,2465 100,2500 200,2500 400,2500 600,2500 800,2500 900,2500 2300,2500 2400,2500 2500,2500 2600,2500 2900,2500 3200,2500 3400,2500 3500,2500 3600,2500 3800,2500 3900,2500 1920,2505 1960,2505 2000,2505 2040,2505 2080,2505 1920,2545 1960,2545 2000,2545 2040,2545 2080,2545 1920,2585 1960,2585 2000,2585 2040,2585 2080,2585 150,2600 350,2600 450,2600 750,2600 850,2600 1150,2600 2650,2600 3050,2600 3250,2600 3450,2600 3550,2600 3650,2600 3850,2600 3950,2600 1920,2625 1960,2625 2000,2625 2040,2625 2080,2625 3280,2633 3353.17,2632.92 643.77,2634.45 739.76,2633.54 643.85,2665.55 739.83,2666.49 3368.96,2665.55 3273.13,2668.85 100,2700 200,2700 400,2700 600,2700 1100,2700 1700,2700 2300,2700 2400,2700 2500,2700 2600,2700 3400,2700 3600,2700 3800,2700 3900,2700 219.41,2795 270.59,2795 619.41,2795 670.59,2795 709.41,2795 760.59,2795 150,2800 850,2800 2650,2800 2750,2800 2850,2800 2950,2800 3050,2800 3250,2800 3650,2800 3850,2800 3950,2800 100,2900 3200,2900 3600,2900 3800,2900 3900,2900 1550,3000 1650,3000 1850,3000 1950,3000 2050,3000 2150,3000 2250,3000 2350,3000 2450,3000 2550,3000 2650,3000 2750,3000 2850,3000 3050,3000 3150,3000 3250,3000 3750,3000 3850,3000 3950,3000 1000,3100 1100,3100 1200,3100 1800,3100 2800,3100 2900,3100 3000,3100 3600,3100 3700,3100 3800,3100 3900,3100 1050,3200 1150,3200 1250,3200 1550,3200 1650,3200 1850,3200 1950,3200 2250,3200 2650,3200 2750,3200 2850,3200 3050,3200 3650,3200 3750,3200 3850,3200 3950,3200 300,3300 400,3300 600,3300 700,3300 800,3300 900,3300 1000,3300 1600,3300 2000,3300 2200,3300 2800,3300 2900,3300 3000,3300 3300,3300 3400,3300 3600,3300 3700,3300 3800,3300 3900,3300 1125,3362.56 1180,3362.56 1235,3362.56 1295,3369.53 150,3400 250,3400 450,3400 550,3400 650,3400 750,3400 1150,3400 1550,3400 1650,3400 1750,3400 1950,3400 2650,3400 3350,3400 3450,3400 3550,3400 3650,3400 3750,3400 3850,3400 3950,3400 340,3413.7 370,3413.7 870,3413.7 900,3413.7 1075,3414.69 1355,3418.15 1385,3418.15 1440,3418.15 1470,3418.15 100,3500 1000,3500 1100,3500 1200,3500 1300,3500 1400,3500 1600,3500 2600,3500 2700,3500 2800,3500 2900,3500 3900,3500 250,3600 550,3600 650,3600 750,3600 850,3600 950,3600 1050,3600 1150,3600 1250,3600 1350,3600 1550,3600 2650,3600 2750,3600 2850,3600 2950,3600 3050,3600 3250,3600 3350,3600 3450,3600 3950,3600 3110,3623.15 3140,3623.15 3630,3628.15 3660,3628.15 100,3700 200,3700 300,3700 400,3700 600,3700 700,3700 800,3700 900,3700 1000,3700 1100,3700 1300,3700 1400,3700 1500,3700 1600,3700 1700,3700 1800,3700 1900,3700 2000,3700 2100,3700 2200,3700 2700,3700 2800,3700 2900,3700 3000,3700 3100,3700 3200,3700 3300,3700 3400,3700 3600,3700 3700,3700 3800,3700 3900,3700 650,3800 750,3800 850,3800 1150,3800 1350,3800 1450,3800 1550,3800 1650,3800 1750,3800 1950,3800 2050,3800 2150,3800 2250,3800 2350,3800 2550,3800 2650,3800 2750,3800 2850,3800 3150,3800 3250,3800 3350,3800 3750,3800 3950,3800 300,3900 400,3900 600,3900 700,3900 800,3900 900,3900 1200,3900 1300,3900 2000,3900 2100,3900 2200,3900 2300,3900 2400,3900 2500,3900 2600,3900 2700,3900 2800,3900 3100,3900 3200,3900 3300,3900 3400,3900 3600,3900
  other v3: 500,100 1300,100 2700,100 3500,100 1650,200 1950,200 2050,200 2350,200 500,300 1300,300 1600,300 1700,300 2000,300 2300,300 2400,300 2600,300 2700,300 3500,300 2450,400 500,500 1300,500 2700,500 3500,500 500,700 1300,700 2700,700 450,800 550,800 650,800 3250,800 3350,800 3450,800 3550,800 3750,800 500,900 600,900 1200,900 2700,900 3200,900 3300,900 3400,900 3500,900 3700,900 3800,900 350,1000 950,1000 1050,1000 1150,1000 1250,1000 1450,1000 3250,1000 3350,1000 3750,1000 300,1100 500,1100 600,1100 700,1100 1005,1100 1400,1100 1500,1100 1600,1100 1800,1100 1900,1100 2100,1100 2200,1100 2300,1100 2400,1100 2700,1100 3700,1100 250,1200 1150,1200 1350,1200 1450,1200 1550,1200 1650,1200 1850,1200 2150,1200 2350,1200 3450,1200 300,1300 500,1300 700,1300 3200,1300 3500,1300 3600,1300 3700,1300 250,1400 650,1400 950,1400 1150,1400 1550,1400 1650,1400 1950,1400 2150,1400 2250,1400 2650,1400 3550,1400 3750,1400 300,1500 1100,1500 1900,1500 2100,1500 2200,1500 2900,1500 3700,1500 250,1600 1150,1600 1850,1600 1950,1600 2050,1600 2350,1600 3550,1600 3750,1600 300,1700 1900,1700 3700,1700 250,1800 950,1800 2150,1800 2350,1800 2450,1800 2550,1800 3350,1800 3550,1800 3750,1800 300,1900 1800,1900 2200,1900 2300,1900 3300,1900 3500,1900 3700,1900 250,2000 950,2000 1850,2000 1950,2000 2050,2000 2150,2000 2350,2000 2450,2000 2550,2000 2650,2000 3350,2000 3550,2000 3750,2000 300,2100 1800,2100 2000,2100 3300,2100 3500,2100 3700,2100 250,2200 1350,2200 1750,2200 1850,2200 1950,2200 2050,2200 2150,2200 2250,2200 2350,2200 3350,2200 3750,2200 300,2300 700,2300 1300,2300 2100,2300 2300,2300 3300,2300 3700,2300 250,2400 650,2400 1850,2400 1950,2400 2050,2400 3350,2400 3750,2400 300,2500 700,2500 1800,2500 3300,2500 3700,2500 250,2600 650,2600 1350,2600 1850,2600 2150,2600 2250,2600 2450,2600 2550,2600 3350,2600 3750,2600 300,2700 500,2700 700,2700 800,2700 2200,2700 2900,2700 3200,2700 3500,2700 3700,2700 1050,2800 1150,2800 1250,2800 1650,2800 1750,2800 1850,2800 1950,2800 2050,2800 2150,2800 2250,2800 2350,2800 2450,2800 2550,2800 3350,2800 3750,2800 500,2885 700,2900 800,2900 900,2900 1000,2900 1100,2900 1200,2900 3300,2900 3400,2900 3500,2900 3700,2900 350,3000 650,3000 750,3000 850,3000 1450,3000 3350,3000 3650,3000 100,3100 500,3100 600,3100 700,3100 800,3100 1500,3100 1600,3100 2000,3100 2100,3100 2200,3100 2300,3100 2400,3100 2500,3100 2600,3100 3500,3100 350,3200 450,3200 550,3200 650,3200 750,3200 850,3200 1350,3200 1450,3200 2050,3200 2150,3200 2350,3200 2450,3200 2550,3200 3450,3200 3550,3200 500,3300 1100,3300 1200,3300 1300,3300 1400,3300 1500,3300 1800,3300 2100,3300 2300,3300 2400,3300 2500,3300 2600,3300 3500,3300 1050,3400 1250,3400 1850,3400 2050,3400 2150,3400 2250,3400 2450,3400 1700,3500 1900,3500 2000,3500 2100,3500 2200,3500 2300,3500 2400,3500 2500,3500 450,3600 1450,3600 2150,3600 2250,3600 2450,3600 3550,3600 500,3700 2300,3700 2600,3700 3500,3700 1850,3800 500,3900 1500,3900 1600,3900 1700,3900 1800,3900 3500,3900
  other v4: 2652.56,370 2470,459.68 3160.31,565 3310.31,565 2652.56,590 2470,609.68 3419.69,610 2515,619.68 3160,747.56 3390,747.56 745,762.44 965,762.44 715.32,900 834.68,945 2365,1322.44 2585,1322.44 3444.69,1430 2335.32,1460 2614.68,1460 3205.63,1461.46 3273.54,1461.46 949.68,1470 3444.69,1470 1642.56,1480 710.63,1496.46 778.54,1496.46 2454.68,1505 2604.68,1505 949.68,1510 3444.69,1510 3273.54,1518.54 1642.56,1535 778.54,1553.54 949.68,1590 1642.56,1590 3444.69,1590 2410,1592.44 2630,1592.44 1445,1594.68 3255.31,1625 3120.47,1628 949.68,1630 1597.56,1645 3120.47,1652 765.32,1665 635.47,1675 3232.44,1675 3120.47,1698 1598.03,1700 747.44,1715 3120.47,1722 2380.32,1730 635.47,1740 1604.53,1745 3120.47,1763 747.44,1770 1604.53,1775 2499.68,1775 2649.68,1775 3245,1782.56 3120.47,1787 1492.56,1800 635.47,1805 755,1810.32 1604.53,1810 3117.44,1835 1604.53,1840 1492.56,1855 642.44,1865 3270,1864.68 1604.53,1875 3117.44,1890 1479.68,1905 1604.53,1905 642.44,1920 1300.32,1940 3077.44,1945 597.44,1980 1300.32,1980 3077.44,2000 1466.46,2011.46 597.44,2035 3077.44,2055 1300.32,2060 1466.46,2068.54 1534.37,2068.54 597.44,2090 656.72,2128.32 688.72,2128.32 720.72,2128.32 3281.07,2129.45 3313.07,2129.45 3345.07,2129.45 667.46,2160.55 699.46,2160.55 3284.79,2160.55 3316.79,2160.55 3412.79,2160.55 1652.56,2225 1652.56,2280 2410,2282.44 2630,2282.44 1460,2324.68 1652.56,2335 1450,2386.85 1480,2386.85 1607.56,2390 2380.32,2420 2659.68,2420 1607.56,2445 2499.68,2465 2649.68,2465 1614.53,2490 1614.53,2520 1502.56,2550 1614.53,2555 1614.53,2585 1502.56,2605 1614.53,2620 3321.17,2632.92 675.77,2634.45 707.77,2634.45 1484.68,2650 1614.53,2650 675.85,2665.55 707.85,2665.55 3304.96,2665.55 3336.96,2665.55 1295.32,2685 1471.46,2761.46 245,2795.63 335,2795.63 1295.32,2805 1471.46,2818.54 1539.37,2818.54 170,2920.32 307.56,2950 125,3029.68 3165,3100.31 3302.56,3130 125,3179.69 307.56,3180 165,3209.69 3120,3219.69 3302.56,3350 3165,3379.69
  other v5: 2548,465 2580,465 2612,465 2548,495 2580,495 2612,495 3258.4,641.31 3288.4,641.31 3258.4,673.31 3288.4,673.31 3258.4,705.31 3288.4,705.31 840,803 870,803 840,835 870,835 840,867 870,867 2460,1363 2490,1363 2460,1395 2490,1395 2460,1427 2490,1427 2505,1633 2535,1633 2505,1665 2535,1665 2505,1697 2535,1697 2505,2323 2535,2323 2505,2355 2535,2355 2505,2387 2535,2387 201.31,3051.6 233.31,3051.6 265.31,3051.6 201.31,3081.6 233.31,3081.6 265.31,3081.6 3198,3225 3230,3225 3262,3225 3198,3255 3230,3255 3262,3255
  other v6: 3466.69,956.69 3510,956.69 3553.31,956.69 458,968 490,968 522,968 458,1000 490,1000 522,1000 3466.69,1000 3510,1000 3553.31,1000 458,1032 490,1032 522,1032 3466.69,1043.31 3510,1043.31 3553.31,1043.31 446.69,2956.69 490,2956.69 533.31,2956.69 3478,2968 3510,2968 3542,2968 446.69,3000 490,3000 533.31,3000 3478,3000 3510,3000 3542,3000 3478,3032 3510,3032 3542,3032 446.69,3043.31 490,3043.31 533.31,3043.31
  other v7: 3272.01,815 3427.99,815 3592.01,820 3747.99,820 3272.01,860 3427.99,860 3592.01,860 3747.99,860 615,940.32 365,945.32 615,1054.68 365,1059.68 252.01,3140 407.99,3140 572.01,3140 727.99,3140 252.01,3180 407.99,3180 572.01,3185 727.99,3185
  other v8: 150,150 1025,150 2975,150 3850,150 150,3850 1025,3850 2975,3850 3850,3850
  other v9: 1419.53,980.87 1388.53,1054.67 1450.04,1055.67 1419.53,1130.47